# Allegro board bf.brd
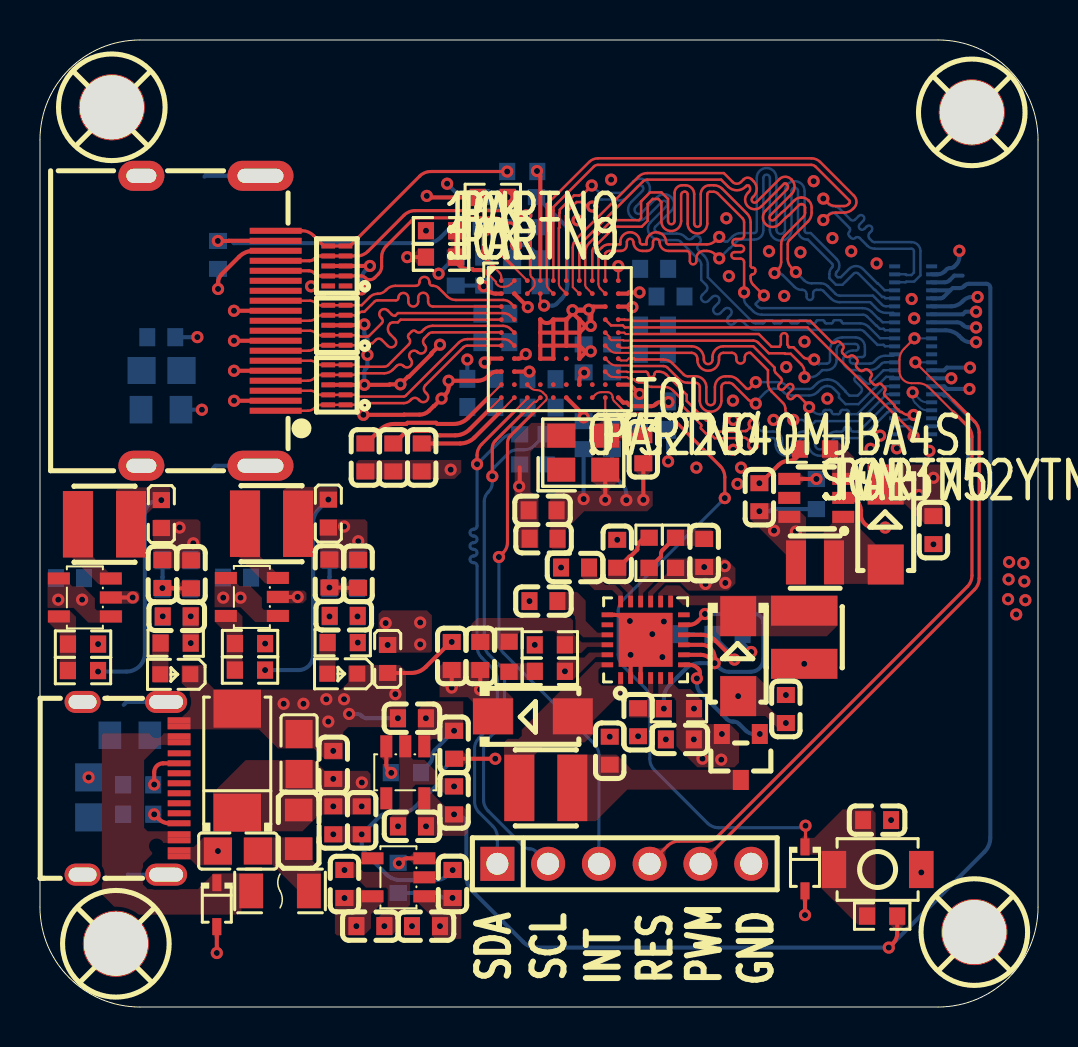
[diagram p0: board, top side]
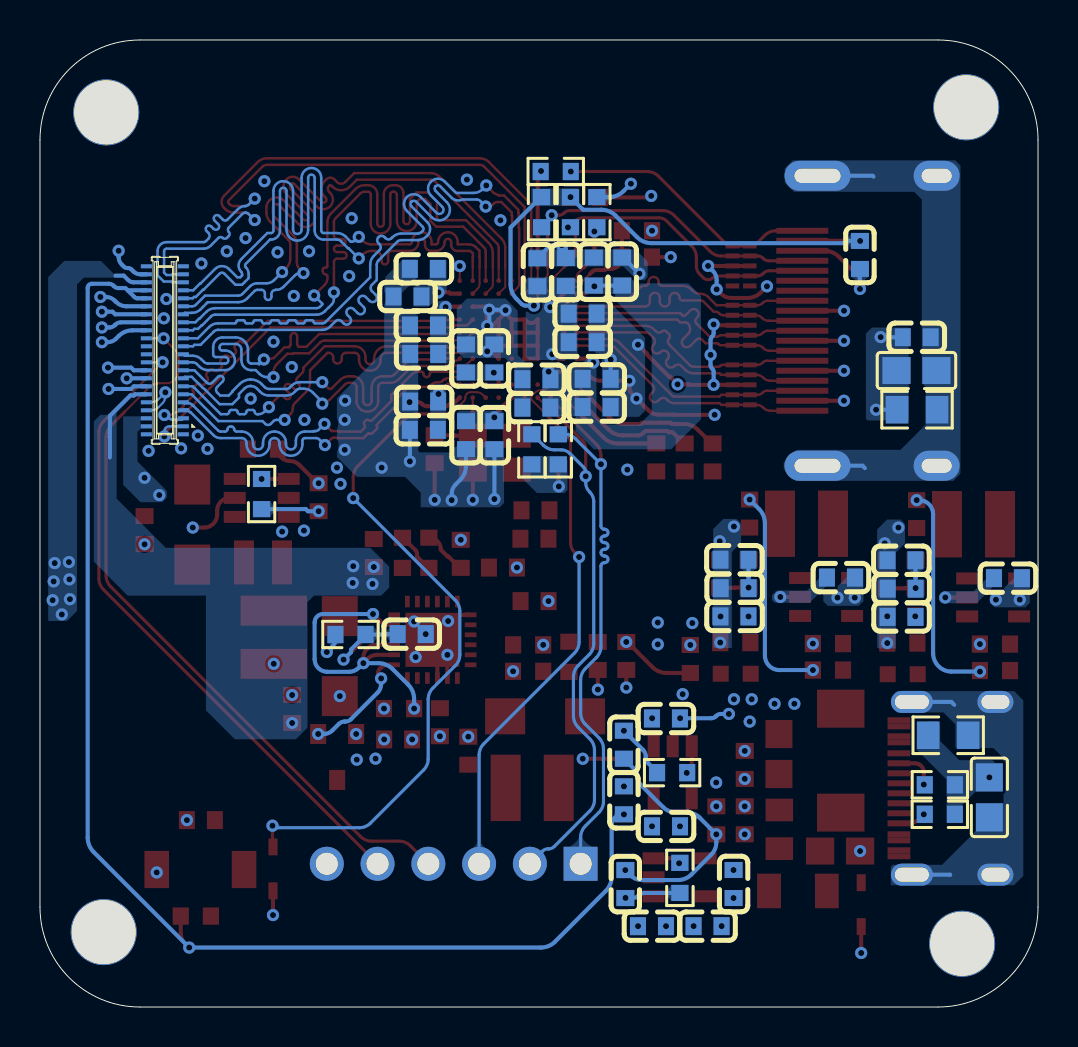
[diagram p1: board, bottom side, seen from below]

Outline 49.94 x 48.36 mm; copper layers: TOP, GND, PWOER, BOTTOM. Coordinates in mm from the lower left corner of the outline.
Outline path: 0,43.36 arc(1.46,46.9) 5,48.36 44.94,48.36 arc(48.47,46.9) 49.94,43.36 49.94,5 arc(48.47,1.46) 44.94,0 5,0 arc(1.46,1.46) 0,5 0,43.36

## Design rules (mm)
constraint set DEFAULT: min track width 0.203
net group MIPI_DIS1: nets MIPI_DSI1_CLK_N MIPI_DSI1_CLK_P MIPI_DSI1_DATA0_N MIPI_DSI1_DATA0_P MIPI_DSI1_DATA1_N MIPI_DSI1_DATA1_P MIPI_DSI1_DATA2_N MIPI_DSI1_DATA2_P MIPI_DSI1_DATA3_N MIPI_DSI1_DATA3_P
net group MIPI_DSI0: nets MIPI_DSI0_CLK_N MIPI_DSI0_CLK_P MIPI_DSI0_DATA0_N MIPI_DSI0_DATA0_P MIPI_DSI0_DATA1_N MIPI_DSI0_DATA1_P MIPI_DSI0_DATA2_N MIPI_DSI0_DATA2_P MIPI_DSI0_DATA3_N MIPI_DSI0_DATA3_P

## Placement (name value [footprint] x y rotation side)
C1  4u7  [C0805]  9.9 7.8 180 top
C2  47uF  [CASE-C]  9.87 12.32 270 top
C3  4u7  [C0805]  12.96 12.65 90 top
C4  100n  [C0603]  14.68 9.34 270 top
C5  10n  [C0603]  14.67 12.11 90 top
C6  1n  [C0603]  16.1 9.34 270 top
C7  4u7  [C0805]  2.43 10.48 270 bottom
C8  1n  [C0603]  18.61 14.44 180 top
C9  10n  [C0603]  20.72 13.12 270 top
C10  100n  [C0603]  20.72 13.12 270 bottom
C11  4u7  [C0603]  9.86 21.48 0 bottom
C12  10u  [C0603]  18.62 14.43 180 bottom
C13  1n  [C0603]  18.61 9.04 180 top
C14  10n  [C0603]  20.72 10.33 90 top
C15  100n  [C0603]  20.72 10.34 90 bottom
C16  10u  [C0603]  18.61 9.03 180 bottom
C17  1n  [C0603]  14.48 21.68 270 top
C18  10n  [C0603]  15.92 21.66 270 top
C19  100n  [C0603]  15.2 19.56 180 top
C20  10u  [C0603]  15.19 22.37 180 bottom
C21  10u  [C0603]  15.18 20.95 180 bottom
C22  22u  [C0603]  15.19 19.53 180 bottom
C23  10n  [C0603]  19.31 4.04 180 top
C24  100n  [C0603]  19.32 4.04 180 bottom
C25  10u  [C0603]  20.65 6.15 90 bottom
C26  10n  [C0603]  16.53 4.05 0 top
C27  100n  [C0603]  16.54 4.04 0 bottom
C28  10u  [C0603]  15.23 6.15 90 bottom
C29  4u7  [C0603]  1.51 21.45 0 bottom
C30  1n  [C0603]  20.64 6.16 90 top
C31  1n  [C0603]  15.24 6.15 90 top
C32  1n  [C0603]  6.13 21.65 270 top
C33  10n  [C0603]  7.56 21.64 270 top
C34  100n  [C0603]  6.84 19.54 180 top
C35  10u  [C0603]  6.82 20.92 180 bottom
C36  10u  [C0603]  6.84 22.34 180 bottom
C37  22u  [C0603]  6.83 19.51 180 bottom
C38  4u7  [C0603]  28.51 12.82 90 top
C39  22u  [C0603]  20.6 17.56 90 top
C40  18p  [C0603]  22.03 17.56 90 top
C41  220n  [C0603]  28.88 22.66 90 top
C42  18p  [C0603]  33.23 22.7 270 top
C43  4u7  [C0603]  32.02 13.38 180 top
C44  100n  [C0603]  29.93 14.24 270 top
C45  10u  [C0603]  44.7 23.85 270 top
C46  22u  [C0603]  35.99 25.5 90 top
C47  100n  [C0603]  31.34 18.65 180 bottom
C48  10n  [C0603]  25.19 20.3 180 top
C49  4n7  [C0603]  26.77 21.98 180 top
C50  22u  [C0603]  37.32 14.9 90 top
C51  4u7  [C0805]  6.08 31.83 180 bottom
C52  10n  [C0603]  6.07 33.5 180 bottom
C53  100n  [C0603]  8.91 37.61 270 bottom
C54  10u  [C0603]  22.08 30 0 bottom
C55  100n  [C0603]  22.08 31.41 0 bottom
C56  10u  [C0603]  25.1 31.4 180 bottom
C57  100n  [C0603]  25.1 29.98 180 bottom
C58  100n  [C0603]  30.73 34.08 0 bottom
C59  10u  [C0603]  30.71 32.66 0 bottom
C60  10u  [C0603]  22.78 33.25 180 bottom
C61  100n  [C0603]  28.62 28.6 270 bottom
C62  100n  [C0603]  23.63 36.76 90 bottom
C63  10u  [C0603]  25.05 36.74 90 bottom
C64  100n  [C0603]  22.78 34.67 180 bottom
C65  10u  [C0603]  27.2 28.6 270 bottom
C66  18p  [C0603]  30.19 27.89 270 top
C67  100n  [C0603]  16.28 27.48 270 top
C68  100n  [C0603]  17.68 27.48 270 top
C69  100n  [C0603]  19.1 27.48 270 top
C70  10u  [C0603]  22.22 36.78 90 bottom
C71  100n  [C0603]  20.8 36.78 90 bottom
C72  100n  [C0603]  27.2 32.44 90 bottom
C73  10u  [C0603]  28.63 32.44 90 bottom
C74  10u  [C0603]  25.15 24.84 0 top
C75  100n  [C0603]  25.2 23.42 0 top
C76  10u  [C0603]  30.73 28.87 0 bottom
C77  100n  [C0603]  30.72 30.29 0 bottom
C78  100n  [C0603]  30.73 36.91 0 bottom
C79  10u  [C0603]  31.55 35.53 0 bottom
C80  100n  [C0603]  41.88 9.35 180 top
CH1  -  [WP7B-P040VA1-R8000]  43.69 32.84 90 bottom
CH2  A254UP-ZD06P  [HDR-TH-6P]  29.24 7.16 0 top
D1  H5VHD3U  [SOD-323]  8.85 5.12 270 top
D2  1N5819  [DO-214AC]  24.66 14.54 0 top
D3  1N5819  [DO-214AC]  42.32 24.13 270 top
D4  1N5819  [DO-214AC]  34.93 17.55 270 top
D5  H3V3HD3U  [SOD-323]  38.28 6.91 270 top
ESD1  IP4292CZ10-TBR,115  [DFN2510A-10]  14.85 31.11 90 top
ESD2  IP4292CZ10-TBR,115  [DFN2510A-10]  14.85 34.1 90 top
ESD3  IP4292CZ10-TBR,115  [DFN2510A-10]  14.85 37.06 90 top
F1  SMD1206-100-30  [PTC1206]  12.01 5.8 0 top
FB1  220R@100MHz  [FB0805]  12.94 8.89 90 top
FB2  600R@100MHz  [FB0603]  17.4 17.41 90 top
FB3  600R@100MHz  [FB0603]  14.43 24.68 270 top
FB4  600R@100MHz  [FB0603]  6.07 24.65 270 top
HDMI1  -  [HDMI-001S]  8.43 34.32 270 top
L1  SWPA3015S2R2NT  [SMD3015]  11.58 24.17 180 top
L2  SWPA3015S2R2NT  [SMD3015]  3.23 24.14 180 top
L3  4.7uH  [SMD3015]  25.31 10.96 0 top
L4  10uH  [SMD252012]  38.78 22.24 0 top
L5  4.7uH  [SMD3015]  38.24 18.49 270 top
LED1  Red  [LED0603]  15.13 16.67 180 top
LED2  Red  [LED0603]  6.77 16.64 180 top
M1  -  [M3]  46.69 44.68 0 top
M2  -  [M3]  3.86 3.1 0 top
M3  -  [M3]  46.81 3.68 0 top
M4  -  [M3]  3.66 44.93 0 top
Q1  AO3401A  [SOT-23]  35.07 12.5 90 top
R1  1M  [R0805]  4.5 13.59 180 bottom
R2  5K11  [R0603]  4.91 11.11 180 bottom
R3  5K11  [R0603]  4.91 9.64 180 bottom
R4  10K  [R0603]  18.31 11.72 180 bottom
R5  41K2  [R0603]  10.51 16.85 180 top
R6  1K  [R0603]  15.15 18.23 180 top
R7  9K09  [R0603]  10.51 18.17 180 top
R8  10K  [R0603]  17.92 6.46 90 bottom
R9  7K68  [R0603]  2.15 16.83 180 top
R10  1K  [R0603]  6.79 18.2 180 top
R11  9K09  [R0603]  2.15 18.15 180 top
R12  43K2  [R0603]  25.51 16.79 180 top
R13  909K  [R0603]  23.47 17.51 90 top
R14  274K  [R0603]  30.48 22.71 270 top
R15  274K  [R0603]  25.51 18.11 180 top
R16  100R  [R0603]  31.97 14.92 180 top
R17  1M2  [R0603]  31.8 22.71 270 top
R18  100K  [R0603]  34.4 18.63 180 bottom
R19  10K  [R0603]  38.85 25.65 90 bottom
R20  9R09  [R0603]  38.78 27.9 180 top
R21  1M  [R0805]  6.05 29.87 180 bottom
R22  46K4  [R0603]  25.32 27.89 90 bottom
R23  46K4  [R0603]  24 27.89 90 bottom
R24  10K  [R0603]  42.14 4.55 180 top
R25  1K  [R0603]  24.13 41.78 180 bottom
R26  46K4  [R0603]  24.84 39.75 90 bottom
R27  46K4  [R0603]  23.39 39.75 90 bottom
R28  10K  [R0603]  20.07 37.5 0 top
R29  100K  [R0603]  22.66 40.49 180 top
R30  2K  [R0603]  22.07 39.75 90 bottom
R31  10K  [R0603]  20.07 38.82 0 top
SW1  1.6N  [SMD4030]  41.91 6.88 180 top
U1  TYPE-C_16PIN  [TYPEC_16PIN]  4.55 10.94 270 top
U2  LP5907MFX-1.8/NOPB  [SOT-23-5]  18.28 11.74 90 top
U3  TLV62569DBV  [SOT-23-5]  10.6 20.51 0 top
U4  TLV62569DBV  [SOT-23-5]  2.25 20.48 0 top
U5  LP5907MFX-1.2/NOPB  [SOT-23-5]  17.93 6.49 0 top
U6  TPS65131RGER  [VQFN-24]  30.3 18.36 90 top
U7  SGM3752YTN6G  [SOT23-6]  38.84 25.46 0 top
U8  TC358870XBG(NOK)  [VFBGA80]  26.01 33.4 0 top
U9  OT322540MJBA4SL  [SMD3225-4P]  27.18 27.72 0 top

## Library data of the parts
C1 C3-C80 = CAP_NP: Tolerance: .TOL; User Part Number: .PARTNO
C2 = CAP_TANTALUM: Tolerance: .TOL; User Part Number: .PARTNO
CH1 = WP7B-P040VA1-R8000: Tolerance: .TOL; User Part Number: .PARTNO
CH2 = TH-6P: Tolerance: .TOL; User Part Number: .PARTNO
D1-D5 = TVS/ESD: Tolerance: .TOL; User Part Number: .PARTNO
ESD1-ESD3 = IP4292CZ10: Tolerance: .TOL; User Part Number: .PARTNO
F1 = Fuse: Tolerance: .TOL; User Part Number: .PARTNO
FB1-FB4 = FerriteBead: Tolerance: .TOL; User Part Number: .PARTNO
HDMI1 = HDMI-A: Tolerance: .TOL; User Part Number: .PARTNO
L1-L5 = Inductor: Tolerance: .TOL; User Part Number: .PARTNO
LED1 LED2 = LED: Tolerance: .TOL; User Part Number: .PARTNO
M1-M4 = M: Tolerance: .TOL; User Part Number: .PARTNO
Q1 = PMOS: Tolerance: .TOL; User Part Number: .PARTNO
R1-R31 = Res: Tolerance: .TOL; User Part Number: .PARTNO
SW1 = Switch-2P: Tolerance: .TOL; User Part Number: .PARTNO
U1 = TYPEC_16PIN: Tolerance: .TOL; User Part Number: .PARTNO
U2 U5 = LP5907MFX: Tolerance: .TOL; User Part Number: .PARTNO
U3 U4 = TLV62569DBV: Tolerance: .TOL; User Part Number: .PARTNO
U6 = TPS65131RGER: Tolerance: .TOL; User Part Number: .PARTNO
U7 = SGM3752YTN6G: Tolerance: .TOL; User Part Number: .PARTNO
U8 = TC358870XBG_1: Tolerance: .TOL; User Part Number: .PARTNO
U9 = XTAL-4P-Oscillator: Tolerance: .TOL; User Part Number: .PARTNO

## Footprints (pads in the part's own frame, mm; a bottom-side part is the same pattern mirrored in y, then rotated)
C0603
  rect 0.8x0.9 smd: 1(-0.7,0) 2(0.7,0)
C0805
  rect 1.41x1.35 smd: 1(-1,0) 2(1,0)
CASE-C
  rect 1.9x2.376 smd: 1(2.6,0) 2(-2.6,0)
DFN2510A-10
  rect 0.25x0.68 smd: 1(-1,-0.435) 2(-0.5,-0.435) 3(0,-0.435) 4(0.5,-0.435) 5(1,-0.435) 6(1,0.435) 7(0.5,0.435) 8(0,0.435) 9(-0.5,0.435) 10(-1,0.435)
DO-214AC
  rect 2x1.8 smd: 1(-2,0) 2(2,0)
FB0603
  rect 0.8x0.864 smd: 1(-0.7,0) 2(0.7,0)
FB0805
  rect 1.133x1.377 smd: 1(-0.966,0) 2(0.966,0)
HDMI-001S
  rect 0.3x2.6 smd: 1(4.5,3.36) 2(4,3.36) 3(3.5,3.36) 4(3,3.36) 5(2.5,3.36) 6(2,3.36) 7(1.5,3.36) 8(1,3.36) 9(0.5,3.36) 10(0,3.36) 11(-0.5,3.36) 12(-1,3.36) 13(-1.5,3.36) 14(-2,3.36) 15(-2.5,3.36) 16(-3,3.36) 17(-3.5,3.36) 18(-4,3.36) 19(-4.5,3.36)
  oval 1.5x3.3 hole 0.7x2.3: 20(-7.25,2.6) 21(7.25,2.6)
  oval 1.5x2.3 hole 0.7x1.5: 22(-7.25,-3.36) 23(7.25,-3.36)
HDR-TH-6P
  rect 1.7x1.7 hole 1.1: 1(-6.35,0)
  round 1.7 hole 1.1: 2(-3.81,0) 3(-1.27,0) 4(1.27,0) 5(3.81,0) 6(6.35,0)
LED0603
  rect 0.8x0.8 smd: 1(-0.749,0) 2(0.749,0)
M3
  round 3.302 hole 3.2: 1(-0.064,0.064)
PTC1206
  rect 1.19x1.728 smd: 1(-1.445,0) 2(1.445,0)
R0603
  rect 0.806x0.864 smd: 1(-0.753,0) 2(0.753,0)
R0805
  rect 1.133x1.377 smd: 1(-1,0) 2(1,0)
SMD3015
  rect 1.5x3.32 smd: 1(1.328,0) 2(-1.328,0)
SMD3225-4P
  rect 1.4x1.2 smd: 1(-1.1,-0.85) 2(1.1,-0.85) 3(1.1,0.85) 4(-1.1,0.85)
SMD4030
  rect 1.23x1.86 smd: 1(-2.185,0) 2(2.185,0)
SMD252012
  rect 1x2.2 smd: 1(-0.95,0) 2(0.95,0)
SOD-323
  rect 0.845x0.455 smd: 1(-1.098,0) 2(1.098,0)
SOT23-6
  rect 1.1x0.6 smd: 1(1.35,-0.95) 2(1.35,0) 3(1.35,0.95) 4(-1.35,0.95) 5(-1.35,0) 6(-1.35,-0.95)
SOT-23
  rect 1x0.8 smd: 1(1.15,-0.95) 2(1.15,0.95) 3(-1.15,0)
SOT-23-5
  rect 1.1x0.6 smd: 1(1.3,-0.95) 2(1.3,0) 3(1.3,0.95) 4(-1.3,0.95) 5(-1.3,-0.95)
TYPEC_16PIN
  oval 1.1x1.8 hole 0.7x1.4: 1(-4.32,-2.415) 3(4.32,-2.415)
  oval 1.1x2.1 hole 0.7x1.7: 2(-4.32,1.764) 4(4.32,1.764)
  rect 0.3x1.14 smd: A1(-3.4,2.414) A4(-2.6,2.414) A5(-1.25,2.414) A6(-0.25,2.414) A7(0.25,2.414) A8(1.25,2.415) A9(2.6,2.415) A12(3.4,2.414) B1(3.1,2.414) B4(2.3,2.415) B5(1.75,2.414) B6(0.75,2.414) B7(-0.75,2.414) B8(-1.75,2.415) B9(-2.3,2.414) B12(-3.1,2.414)
VFBGA80
  round 0.24 smd: A1(-2.925,2.925) A2(-2.275,2.925) A3(-1.625,2.925) A4(-0.975,2.925) A5(-0.325,2.925) A6(0.325,2.925) A7(0.975,2.925) A8(1.625,2.925) A9(2.275,2.925) A10(2.925,2.925) B1(-2.925,2.275) B2(-2.275,2.275) B3(-1.625,2.275) B4(-0.975,2.275) B5(-0.325,2.275) B6(0.325,2.275) B7(0.975,2.275) B8(1.625,2.275) B9(2.275,2.275) B10(2.925,2.275) C1(-2.925,1.625) C2(-2.275,1.625) C9(2.275,1.625) C10(2.925,1.625) D1(-2.925,0.975) D2(-2.275,0.975) D4(-0.975,0.975) D5(-0.325,0.975) D6(0.325,0.975) D7(0.975,0.975) D9(2.275,0.975) D10(2.925,0.975) E1(-2.925,0.325) E2(-2.275,0.325) E4(-0.975,0.325) E5(-0.325,0.325) E6(0.325,0.325) E7(0.975,0.325) E9(2.275,0.325) E10(2.925,0.325) F1(-2.925,-0.325) F2(-2.275,-0.325) F4(-0.975,-0.325) F5(-0.325,-0.325) F6(0.325,-0.325) F7(0.975,-0.325) F9(2.275,-0.325) F10(2.925,-0.325) G1(-2.925,-0.975) G2(-2.275,-0.975) G4(-0.975,-0.975) G5(-0.325,-0.975) G6(0.325,-0.975) G7(0.975,-0.975) G9(2.275,-0.975) G10(2.925,-0.975) H1(-2.925,-1.625) H2(-2.275,-1.625) H9(2.275,-1.625) H10(2.925,-1.625) J1(-2.925,-2.275) J2(-2.275,-2.275) J3(-1.625,-2.275) J4(-0.975,-2.275) J5(-0.325,-2.275) J6(0.325,-2.275) J7(0.975,-2.275) J8(1.625,-2.275) J9(2.275,-2.275) J10(2.925,-2.275) K1(-2.925,-2.925) K2(-2.275,-2.925) K3(-1.625,-2.925) K4(-0.975,-2.925) K5(-0.325,-2.925) K6(0.325,-2.925) K7(0.975,-2.925) K8(1.625,-2.925) K9(2.275,-2.925) K10(2.925,-2.925)
VQFN-24
  rect 0.584x0.24 smd: 1(-1.913,1.25) 2(-1.913,0.75) 3(-1.913,0.25) 4(-1.913,-0.25) 5(-1.913,-0.75) 6(-1.913,-1.25)
  rect 0.24x0.58 smd: 7(-1.25,-1.913) 8(-0.75,-1.913) 9(-0.25,-1.913) 10(0.25,-1.913) 11(0.75,-1.913) 12(1.25,-1.913) 19(1.25,1.913) 20(0.75,1.913) 21(0.25,1.913) 22(-0.25,1.913) 23(-0.75,1.913) 24(-1.25,1.913)
  rect 0.58x0.24 smd: 13(1.913,-1.25) 14(1.913,-0.75) 15(1.913,-0.25) 16(1.913,0.25) 17(1.913,0.75) 18(1.913,1.25)
  rect 2.7x2.7 smd: 25(-0.001,-0.001)
WP7B-P040VA1-R8000
  rect 0.2x0.55 smd: 1(-3.8,-0.925) 2(-3.4,-0.925) 3(-3,-0.925) 4(-2.6,-0.925) 5(-2.2,-0.925) 6(-1.8,-0.925) 7(-1.4,-0.925) 8(-1,-0.925) 9(-0.6,-0.925) 10(-0.2,-0.925) 11(0.2,-0.925) 12(0.6,-0.925) 13(1,-0.925) 14(1.4,-0.925) 15(1.8,-0.925) 16(2.2,-0.925) 17(2.6,-0.925) 18(3,-0.925) 19(3.4,-0.925) 20(3.8,-0.925) 21(3.8,0.925) 22(3.4,0.925) 23(3,0.925) 24(2.6,0.925) 25(2.2,0.925) 26(1.8,0.925) 27(1.4,0.925) 28(1,0.925) 29(0.6,0.925) 30(0.2,0.925) 31(-0.2,0.925) 32(-0.6,0.925) 33(-1,0.925) 34(-1.4,0.925) 35(-1.8,0.925) 36(-2.2,0.925) 37(-2.6,0.925) 38(-3,0.925) 39(-3.4,0.925) 40(-3.8,0.925) P1(-4.2,-0.925) P2(4.2,-0.925) P3(4.2,0.925) P4(-4.2,0.925)

## Nets
GND: C13.2 C14.2 C15.2 C16.2 C26.2 C27.2 C28.2 C31.2 C51.1 C52.1 C53.2 C54.1 C55.1 C56.1 C57.1 C58.2 C59.2 C60.2 C61.2 C62.2 C63.2 C64.2 C65.2 C66.2 C67.2 C68.2 C69.2 C70.2 C71.2 C72.2 C73.2 C74.2 C75.2 C76.2 C77.2 C78.2 C79.2 C80.1 CH1.21 CH1.25 CH1.26 CH1.27 CH1.28 CH1.33 CH1.34 CH1.35 CH1.37 CH1.38 CH2.6 D5.2 ESD1.3 ESD1.8 ESD2.3 ESD2.8 ESD3.3 ESD3.8 FB2.2 HDMI1.2 HDMI1.5 HDMI1.8 HDMI1.11 HDMI1.17 R21.1 R29.2 R31.1 SW1.1 U2.2 U5.2 U8.A10 U8.C9 U8.D4 U8.D5 U8.D6 U8.D7 U8.E4 U8.E5 U8.E6 U8.E7 U8.F4 U8.F5 U8.F6 U8.F7 U8.G4 U8.G5(TEST) U8.G7 U8.H1 U8.K10 U9.2
PGND: C1.2 C2.2 C3.2 C4.2 C5.2 C6.2 C7.1 C8.2 C9.2 C10.2 C11.2 C12.2 C17.2 C18.2 C19.2 C20.2 C21.2 C22.2 C23.2 C24.2 C25.2 C29.2 C30.2 C32.2 C33.2 C34.2 C35.2 C36.2 C37.2 C38.2 C39.2 C41.2 C43.2 C44.2 C45.2 C46.2 C47.2 C48.2 C49.2 C50.2 D1.2 FB2.1 L5.1 LED1.1(CATHODE) LED2.1(CATHODE) R1.1 R2.2 R3.2 R7.1 R11.1 R15.2 R20.2 U1.A1 U1.A12 U1.B1 U1.B12 U3.2 U4.2 U6.2 U6.3 U6.19 U6.25 U7.2
VCC_1V1: C32.1 C33.1 C34.1 C35.1 C36.1 C37.1 C58.1 C59.1 C60.1 C61.1 C62.1 C63.1 C64.1 C65.1 FB4.2 R10.1 U8.B2 U8.C10 U8.G2 U8.K6
VCC_1V2: C26.1 C27.1 C28.1 C31.1 C76.1 C77.1 C78.1 C79.1 U5.5(OUT) U8.B10 U8.J10
VCC_1V8: C13.1 C14.1 C15.1 C16.1 C72.1 C73.1 C74.1 C75.1 CH1.23 CH1.24 R22.1 R23.1 R24.1 U2.5(OUT) U8.J7 U9.4(VDD)
VCC_3V3: C8.1 C9.1 C10.1 C12.1 C17.1 C18.1 C19.1 C20.1 C21.1 C22.1 C23.1 C24.1 C25.1 C30.1 C46.1 C54.2 C55.2 C56.2 C57.2 C70.1 C71.1 FB3.2 L4.1 R4.1 R6.1 R8.1 R19.1 R28.1 R30.2 U2.1 U5.1 U7.6(VIN) U8.B1 U8.G1 U8.H2
VCC_5V: C2.1 C3.1 C4.1 C5.1 C6.1 C11.1 C29.1 C43.1 FB1.2 Q1.2 R16.1 R18.1 U3.1 U3.4(VIN) U4.1 U4.4(VIN) U6.5 U6.6
VCC_5V5: C39.1 C40.1 CH1.22 D2.1(CATHODE) R12.1 U6.23
VCC_HDMIRX_IN: C53.1 HDMI1.18 R26.2 R27.2 R29.1 U8.B4
VCC_LED_AB: C45.1 CH1.39 CH1.40 D3.1(CATHODE)
VEE_5V5: C42.2 C50.1 CH1.36 D4.2 R17.2 U6.15
HDMI_CLK_N: ESD2.5 ESD2.6 HDMI1.12 U8.C2
HDMI_CLK_P: ESD2.4 ESD2.7 HDMI1.10 U8.C1
HDMI_DATA0_N: ESD2.2 ESD2.9(N.C./4) HDMI1.9 U8.D2
HDMI_DATA0_P: ESD2.1 ESD2.10 HDMI1.7 U8.D1
HDMI_DATA1_N: ESD1.5 ESD1.6 HDMI1.6 U8.E2
HDMI_DATA1_P: ESD1.4 ESD1.7 HDMI1.4 U8.E1
HDMI_DATA2_N: ESD1.2 ESD1.9(N.C./4) HDMI1.3 U8.F2
HDMI_DATA2_P: ESD1.1 ESD1.10 HDMI1.1 U8.F1
HDP: ESD3.5 ESD3.6 HDMI1.19 R25.2
I2C_SCL: CH2.2 R22.2 U8.K4
I2C_SDA: CH2.1 R23.2 U8.K3
INT: CH2.3 U8.J3
LED_FB: R20.1 U7.3
MIPI_DSI0_CLK_N: CH1.5 U8.F9
MIPI_DSI0_CLK_P: CH1.6 U8.F10
MIPI_DSI0_DATA0_N: CH1.3 U8.H9
MIPI_DSI0_DATA0_P: CH1.4 U8.H10
MIPI_DSI0_DATA1_N: CH1.7 U8.G9
MIPI_DSI0_DATA1_P: CH1.8 U8.G10
MIPI_DSI0_DATA2_N: CH1.9 U8.E9
MIPI_DSI0_DATA2_P: CH1.10 U8.E10
MIPI_DSI0_DATA3_N: CH1.1 U8.D9
MIPI_DSI0_DATA3_P: CH1.2 U8.D10
MIPI_DSI1_CLK_N: CH1.16 U8.B7
MIPI_DSI1_CLK_P: CH1.15 U8.A7
MIPI_DSI1_DATA0_N: CH1.18 U8.B9
MIPI_DSI1_DATA0_P: CH1.17 U8.A9
MIPI_DSI1_DATA1_N: CH1.14 U8.B8
MIPI_DSI1_DATA1_P: CH1.13 U8.A8
MIPI_DSI1_DATA2_N: CH1.12 U8.B6
MIPI_DSI1_DATA2_P: CH1.11 U8.A6
MIPI_DSI1_DATA3_N: CH1.20 U8.B5
MIPI_DSI1_DATA3_P: CH1.19 U8.A5
PWM: CH1.32 CH2.5
RESETN: C80.2 D5.1(CATHODE) R24.2 SW1.2 U8.K8
RESX: CH1.29 CH2.4
SCL: ESD3.2 ESD3.9(N.C./4) HDMI1.15 R27.1 U8.A3
SDA: ESD3.4 ESD3.7 HDMI1.16(SDA) R26.1 U8.B3
N236681: D1.1(CATHODE) F1.1 U1.A4 U1.A9 U1.B4(VBUS_3) U1.B9
N236693: C1.1 F1.2 FB1.1
N236737: C7.2 R1.2 U1.1 U1.2 U1.3 U1.4
N236965: R2.1 U1.A5
N237015: R3.1 U1.B5
N238261: L1.1 U3.3
N238489: R5.2 R7.2 U3.5
N242953: L2.1 U4.3
N243181: R9.2 R11.2 U4.5
N255792: D3.2 L4.2 U7.1
N259894: D2.2 L3.2 U6.1 U6.24
N259982: Q1.1 U6.7
N260038: C38.1 L3.1 Q1.3(SOURCE)
N260195: C44.1 R16.2 U6.4 U6.8 U6.9 U6.11
N260318: C47.1 R18.2 U6.10
N262227: R12.2 R13.1
N262241: C40.2 R13.2 R15.1 U6.22
N262519: C41.1 R14.1 U6.17(VREF)
N262525: C42.1 R14.2 R17.1 U6.16
N262973: D4.1(CATHODE) L5.2 U6.13 U6.14
N263055: C48.1 U6.21
N263067: C49.1 U6.18
N271809: C51.2 C52.2 HDMI1.20 HDMI1.21 HDMI1.22 HDMI1.23 R21.2
N279408: R28.2 R31.2 U8.A2
N284077: C67.1 U8.J1
N284159: C68.1 U8.K1
N284174: C69.1 U8.K2
N284871: C66.1 U8.K9 U9.3
N2381410: FB3.1 L1.2 R5.1
N2382151: LED1.2 R6.2
N2390621: R4.2 U2.3
N2428410: FB4.1 L2.2 R9.1
N2429111: LED2.2 R10.2
N2437651: R8.2 U5.3
N2531863: R19.2 U7.4
N2739972: R25.1 U8.A4
N27399713: R30.1 U8.A1

Pads without a net: CH1 30 31 P1 P2 P3 P4; ESD3 1 10; HDMI1 13 14; M1 1; M2 1; M3 1; M4 1; U1 A6 A7 A8 B6 B7 B8; U2 4; U5 4; U6 12 20; U7 5; U8 G6 J2 J4 J5 J6 J8 J9 K5 K7; U9 1

## Via types
v1: diameter 0.61, hole 0.305, TOP to BOTTOM, 240 vias

## Routing (per net, layer and track width the routed paths; a pad name or vN(x,y) marks a point on that pad's centre or on a via; arc(x,y) is an arc through that point)
GND: length 103
  TOP w0.102: U8.A10 28.93,36.98
  TOP w0.203: U8.F5 U8.F6 ; U8.F5 U8.E5 ; U8.F5 U8.G5 U8.G4 U8.F4 ; U8.F5 U8.F4 ; U8.F6 U8.F7 ; U8.F6 U8.E6 ; 26.62,34.74 26.62,34.82 v1(26.64,34.85) ; 26.62,34.74 U8.D7 ; 26.62,34.74 26.62,34.66 U8.D6 ; HDMI1.5 v1(9.71,31.82) ; D5.2 v1(38.28,4.6) ; U8.D7 27.3,34.06 27.32,34.06 ; U8.D7 U8.E7 ; U8.E4 U8.E5 ; U8.E4 U8.F4 ; U8.E4 U8.D4 25.1,34.32 arc(25.36,34.21) 25.62,34.32 U8.D5 ; U8.E5 U8.E6 ; U8.E5 U8.D5 ; U8.F7 U8.G7 27.35,32.79 ; U8.F7 U8.E7 ; U8.F7 27.27,32.79 27.35,32.79 ; v1(8.91,35.91) 8.91,36.21 arc(8.96,36.45) 9.09,36.65 9.97,37.52 arc(10.3,37.74) 10.69,37.82 HDMI1.17 ; U8.E7 27.32,34.06 ; U8.E7 U8.E6 ; v1(16.51,37.06) ESD3.3 ESD3.8 ; v1(16.18,29.62) 18.21,29.62 18.22,29.62 18.99,29.62 arc(19.25,29.68) 19.47,29.82 19.7,30.05 19.71,30.05 v1(20.09,30.43) 20.28,30.62 arc(20.4,30.8) 20.45,31.02 v1(20.45,31.32) 21.89,31.32 arc(22.18,31.37) 22.41,31.53 22.52,31.64 arc(22.67,31.74) 22.85,31.78 U8.H1 ; U8.D5 U8.D6 ; U8.D6 U8.E6 ; ESD1.8 ESD1.3 16.23,31.11 v1(16.23,31.12) 17.48,31.12 17.5,31.14 v1(18.03,31.14) 18.41,31.52 18.45,31.52 19.58,32.65 19.58,32.69 v1(20.02,33.12) ; 27.35,32.79 v1(27.56,32.79) ; v1(13.56,36.04) 13.87,35.74 arc(14.18,35.53) 14.54,35.46 15.36,35.46 arc(15.63,35.51) 15.85,35.66 v1(16.08,35.89) ; HDMI1.2 v1(9.71,30.32) ; v1(19.35,40.56) 19.43,40.49 R29.2 ; v1(27.46,34.87) 27.55,34.96 arc(27.62,35.01) 27.7,35.03 U8.C9 ; v1(31.45,30.25) 31.04,30.25 arc(30.92,30.23) 30.82,30.16 30.8,30.14 arc(30.7,30.07) 30.59,30.05 29.65,30.05 arc(29.55,30.07) 29.47,30.12 29.36,30.23 29.18,30.23 U8.K10 ; v1(27.56,34.06) 27.32,34.06 ; HDMI1.11 v1(9.71,34.82) ; 28.93,36.98 v1(28.93,37.05) ; U9.2 v1(28.28,25.36) ; C66.2 v1(30.19,25.36) ; v1(16.23,34.14) 16.19,34.1 ESD2.3 ESD2.8 ; HDMI1.8 v1(9.71,33.32) ; SW1.1 v1(44.1,6.73)
  TOP w0.254: v1(27.56,34.06) 27.56,34.77 v1(27.46,34.87) 27.43,34.85 v1(26.64,34.85)
  BOTTOM w0.102: CH1.37 44.37,30.24 arc(44.18,30.28) 44.01,30.39 v1(43.66,30.74) 43.66,30.53 arc(43.7,30.35) 43.8,30.21 44.01,29.99 arc(44.18,29.88) 44.37,29.84 CH1.38
  BOTTOM w0.203: v1(29.34,25.35) 29.34,25.66 arc(29.29,25.91) 29.14,26.13 28.92,26.35 arc(28.7,26.68) 28.62,27.07 C61.2 ; v1(46.84,34.77) 46.3,34.77 46.17,34.64 CH1.26 ; C65.2 v1(27.2,25.4) ; v1(7.87,33.5) 7.87,33.5 C52.1 ; CH1.27 45.89,34.24 arc(46.03,34.21) 46.16,34.13 46.19,34.1 arc(46.32,34.01) 46.47,33.99 v1(46.84,33.99) ; v1(26.64,34.85) 26.67,34.87 v1(27.46,34.87) 27.46,34.16 v1(27.56,34.06) ; C71.2 20.75,37.48 v1(19.95,36.67) ; v1(8.1,29.87) 8.1,29.87 R21.1 ; CH1.33 45.24,31.84 45.38,31.98 v1(46.53,31.98) ; v1(46.91,35.51) 46.63,35.51 arc(46.4,35.46) 46.21,35.33 46.13,35.26 arc(45.89,35.1) 45.6,35.04 CH1.25 ; C55.1 v1(21.38,32.38) ; v1(16.51,37.06) 16.28,36.83 arc(16.13,36.61) 16.08,36.35 v1(16.08,35.89) ; CH1.34 v1(45.6,31.44) ; CH1.35 45.24,31.04 45.38,30.91 v1(46.5,30.91) ; CH1.28 45.31,33.84 arc(45.68,33.77) 45.99,33.56 46.13,33.42 arc(46.32,33.29) 46.55,33.25 v1(46.84,33.25) ; C53.2 v1(8.91,35.91) ; C63.2 24.39,38.1 v1(23.83,38.1) 23.63,37.9 C62.2 ; CH1.21 44.91,36.64 arc(45.1,36.68) 45.26,36.79 45.36,36.89 arc(45.44,36.94) 45.53,36.96 45.57,36.96 arc(45.66,36.98) 45.74,37.03 45.85,37.14 arc(45.96,37.3) 46,37.5 v1(46,37.82) ; v1(16.23,34.14) 16.23,33.69 arc(16.25,33.61) 16.29,33.54 16.32,33.51 arc(16.37,33.45) 16.38,33.36 v1(16.38,32.61) 16.38,32.09 arc(16.37,32.01) 16.32,31.94 16.29,31.91 arc(16.25,31.84) 16.23,31.76 v1(16.23,31.12) ; C76.2 v1(31.43,27.29)
  vias: v1(15.24,6.85) v1(17.3,19.2) v1(17.23,4.05) v1(17.4,18.11) v1(17.91,9.04) v1(19.02,19.23) v1(19.02,18.14) v1(19.31,38.82) v1(20.55,26.87) v1(20.72,11.03) v1(26.9,39.34) v1(28.57,41.38) v1(32.84,26.97) v1(34.34,39.45) v1(34.47,36.55) v1(34.67,30.33) v1(34.69,29.37) v1(34.69,27.87) v1(34.9,26.16) v1(35.08,26.97) v1(36.47,37.8) v1(36.7,29.36) v1(37.24,35.56) v1(37.34,32) v1(38.05,37.74) v1(38.25,33.27) v1(38.71,41.3) v1(39.4,30.43) v1(39.65,38.46) v1(40.59,37.8) v1(41.55,27.91) v1(41.86,37.19) v1(42.04,28.58) v1(42.58,9.35) v1(42.88,27.94) v1(43.61,35.41) v1(43.74,34.44) v1(44.5,27.81)
PGND: length 43.8
  TOP w0.203: U6.2 v1(29.55,17.61) 30.05,18.11 ; v1(14.48,20.98) 15.16,20.98 15.17,20.96 C18.2 ; FB2.1 18.58,16.71 arc(18.97,16.78) 19.3,17 20.55,18.26 v1(20.6,18.26) ; D1.2 v1(8.85,2.7) ; U7.2 40.44,25.46 arc(40.89,25.28) 41.07,24.83 41.07,24.63 arc(41.26,24.17) 41.72,23.98 v1(42.29,23.98) ; 30.05,18.11 U6.25 29.27,19.39 arc(29.03,19.56) 28.74,19.61 U6.19 ; 30.05,18.11 U6.3 ; v1(6.13,20.95) 6.66,20.95 6.67,20.94 C33.2 ; R20.2 38.03,27.87 arc(37.86,27.47) 37.46,27.31 37.44,27.31 arc(37.18,27.26) 36.96,27.11 36.04,26.2 v1(35.99,26.2) ; C45.2 v1(44.7,23.14) ; C9.2 v1(22.78,12.42) ; U4.2 v1(4.64,20.48) ; U3.2 v1(12.89,20.51)
  GND w0.203: 37.34,25.1 37.09,25.1 v1(35.99,26.2)
  BOTTOM w0.203: v1(17.91,14.44) 16.35,14.44 arc(16.23,14.47) 16.12,14.53 16.09,14.56 arc(15.99,14.63) 15.87,14.66 v1(15.47,14.66) ; C36.2 6.14,21.49 6.13,21.48 v1(6.13,20.95) ; v1(14.48,20.98) 14.48,21.51 14.49,21.52 C20.2 ; v1(20.65,6.85) 20.39,6.58 arc(20.13,6.41) 19.82,6.35 18.01,6.35 arc(17.65,6.42) 17.35,6.62 16.35,7.62 arc(16.16,7.9) 16.1,8.23 v1(16.1,8.64) 16.95,9.49 arc(17.2,9.65) 17.49,9.71 18.05,9.71 arc(18.44,9.79) 18.77,10.01 19.89,11.13 arc(20,11.29) 20.04,11.49 20.04,11.53 arc(20.08,11.72) 20.19,11.89 C10.2
  vias: v1(2.43,11.48) v1(2.91,18.15) v1(6.14,19.54) v1(8.9,7.8) v1(11.26,18.17) v1(12.19,15.16) v1(13.18,15.16) v1(14.33,15.39) v1(14.49,19.53) v1(14.43,14.27) v1(14.67,12.81) v1(14.68,8.64) v1(15.21,15.39) v1(17.78,15.65) v1(18.61,4.04) v1(24.49,20.3) v1(24.76,18.11) v1(26.07,21.98) v1(28.51,13.52) v1(28.88,23.36) v1(29.51,19.3) v1(29.93,13.54) v1(30.64,18.65) v1(31.22,19.28) v1(31.14,17.5) v1(31.32,13.38) v1(37.32,15.6) v1(38.24,17.16)
VCC_1V1: length 3.7
  TOP w0.203: v1(24.31,32.65) 24.18,32.52 arc(24.07,32.45) 23.94,32.43 U8.G2 ; v1(29.64,35) 29.62,35.03 U8.C10 ; U8.K6 27.2,29.61 v1(27.2,29.49) ; U8.B2 v1(24.41,35) ; v1(7.54,18.2) 7.54,18.26
  vias: v1(6.98,23.98) v1(7.54,19.54) v1(7.67,23.19)
VCC_1V2: length 2.7
  TOP w0.203: v1(30,30.66) 29.62,31.03 29.61,31.03 29.52,31.13 U8.J10 ; v1(30,35.74) 29.46,35.74 29.4,35.68 U8.B10
  BOTTOM w0.203: v1(30,30.66) 30.02,30.64 C77.1
  vias: v1(15.24,5.45) v1(15.83,4.05)
VCC_1V8: length 68.9
  TOP w0.203: 24,26.99 24,26.06 v1(23.98,26.04) ; U8.J7 26.98,31.33 arc(27.01,31.47) 27.09,31.59 v1(27.23,31.72) ; R24.1 42.89,3.67 arc(42.84,3.42) 42.69,3.2 v1(42.47,2.97)
  BOTTOM w0.102: 45.66,35.95 45.69,35.95
  BOTTOM w0.203: 45.54,35.84 45.66,35.95 ; 45.54,35.84 CH1.23 ; 45.54,35.84 45.2,35.5 arc(45.14,35.46) 45.06,35.44 CH1.24 ; C15.1 20.77,9.64 arc(21.17,9.47) 21.33,9.08 21.33,6.52 arc(21.41,6.13) 21.63,5.8 24.16,3.27 arc(24.49,3.05) 24.88,2.97 v1(42.47,2.97) 47.25,7.75 arc(47.47,8.08) 47.55,8.47 47.55,35.97 arc(47.49,36.11) 47.35,36.17 46.49,36.17 arc(46.37,36.15) 46.26,36.08 46.23,36.05 arc(46.13,35.98) 46.01,35.95 45.69,35.95
  vias: v1(19.31,9.04) v1(20.72,9.63)
VCC_3V3: length 15.4
  TOP w0.203: R28.1 v1(18.38,37.5) ; U8.H2 v1(24.49,31.78) ; U8.G1 22.56,32.43 arc(22.45,32.4) 22.36,32.34 v1(22.25,32.23) ; U8.B1 22.8,35.68 arc(22.58,35.72) 22.4,35.84 v1(22.2,36.04)
  BOTTOM w0.203: C71.1 C70.1 ; v1(35.99,24.8) 36.53,24.8 36.63,24.9 R19.1 ; v1(20.37,41.17) 20.74,40.8 arc(21.07,40.58) 21.46,40.5 R30.2 ; R4.1 19.06,11.75 19.5,12.19 arc(19.59,12.33) 19.63,12.5 19.63,12.54 arc(19.66,12.71) 19.76,12.85 v1(20.72,13.82) ; R8.1 19.7,5.7 arc(19.85,5.68) 19.97,5.59 20,5.57 arc(20.12,5.48) 20.26,5.46 v1(20.64,5.46)
  vias: v1(15.21,24.03) v1(15.89,19.53) v1(15.9,18.23) v1(15.93,23.29) v1(19.31,14.44) v1(20.01,4.04) v1(36.73,23.83) v1(37.82,23.77)
VCC_5V: length 1
  BOTTOM w0.203: R18.1 35.15,18.39 arc(35.19,18.2) 35.3,18.04 v1(35.59,17.75)
  vias: v1(0.91,20.37) v1(2.11,20.37) v1(9.17,20.47) v1(10.03,20.47) v1(14.67,11.41) v1(14.68,10.04) v1(16.1,11.23) v1(16.1,10.04) v1(32.72,14.92) v1(32.72,13.38) v1(33.15,12.42) v1(34.12,13.65) v1(34.09,12.37)
VCC_5V5: length 5.2
  TOP w0.203: C39.1 20.6,15.98 v1(20.6,15.98) ; C40.1 22.03,15.88 v1(22.02,15.88)
  PWOER w0.203: v1(22.02,15.88) 23.57,15.88 23.67,15.98
  BOTTOM w0.203: CH1.22 45.26,36.24 arc(45.4,36.27) 45.52,36.35 45.74,36.58 46.16,36.58
  vias: v1(26.27,16.79) v1(48.49,22.25) v1(48.46,21.39) v1(48.44,20.4) v1(48.84,19.63) v1(49.2,22.2) v1(49.25,21.29) v1(49.3,20.35)
VCC_HDMIRX_IN: length 25.8
  TOP w0.102: v1(25.22,35.08) 25.12,35.18 arc(25.06,35.27) 25.03,35.39 U8.B4
  TOP w0.203: v1(8.9,38.31) 9.43,38.31 9.44,38.32 HDMI1.18
  BOTTOM w0.203: v1(25.22,35.08) 25.64,35.08 arc(25.75,35.1) 25.84,35.16 26.09,35.41 arc(26.31,35.74) 26.39,36.13 26.39,38.98 24.87,40.5 R26.2 ; v1(23.39,40.5) 22.76,39.87 21.85,39.87 arc(21.46,39.8) 21.13,39.58 20.06,38.5 arc(19.73,38.28) 19.34,38.2 9.7,38.2 9.59,38.31 C53.1 v1(8.9,38.31)
VCC_LED_AB:
  vias: v1(43.97,25.6) v1(44.7,26.47)
VEE_5V5: length 4.5
  TOP w0.203: 34.9,15.47 34.93,15.5 v1(34.93,15.55) 34.9,15.55 34.87,15.57
  BOTTOM w0.203: CH1.36 45.18,30.64 45.24,30.58 45.42,30.58 46.44,29.56 46.44,27.48
  vias: v1(33.23,22) v1(33.3,21.16) v1(34.26,22.05) v1(34.29,21.21) v1(37.32,14.2)
HDMI_CLK_N: length 13.2
  TOP w0.124: HDMI1.12 13.52,35.32 arc(13.66,35.29) 13.77,35.22 13.79,35.2 arc(13.9,35.12) 14.04,35.1 ESD2.6 ESD2.5 16.09,35.1 16.5,35.51 arc(16.68,35.63) 16.89,35.67 16.91,35.67 arc(17.11,35.71) 17.28,35.82 17.34,35.89 arc(17.55,36.02) 17.78,36.07 18.82,36.07 arc(18.94,36.12) 18.98,36.23 18.98,36.27 arc(19.23,36.51) 19.48,36.27 19.48,36.23 arc(19.53,36.12) 19.65,36.07 19.67,36.07 arc(19.83,36.04) 19.96,35.95 20.37,35.54 arc(20.57,35.41) 20.81,35.36 23.18,35.36 arc(23.38,35.32) 23.56,35.2 U8.C2
HDMI_CLK_P: length 13.3
  TOP w0.124: HDMI1.10 13.48,34.32 arc(13.65,34.35) 13.8,34.45 13.81,34.47 arc(13.96,34.56) 14.13,34.6 ESD2.7 ESD2.4 15.75,34.6 arc(15.85,34.62) 15.93,34.67 15.97,34.71 arc(16.04,34.75) 16.12,34.77 16.23,34.77 16.74,35.28 arc(16.81,35.32) 16.89,35.34 17.81,35.34 arc(17.9,35.38) 17.93,35.46 arc(17.96,35.57) 18.02,35.66 arc(18.29,35.69) 18.43,35.46 18.43,35.28 arc(18.68,35.03) 18.92,35.28 18.92,35.47 arc(19.17,35.72) 19.42,35.47 19.42,35.28 arc(19.49,35.11) 19.67,35.03 23.08,35.03 U8.C1
HDMI_DATA0_N: length 13.4
  TOP w0.124: HDMI1.9 13.52,33.82 arc(13.66,33.79) 13.77,33.72 13.79,33.7 arc(13.9,33.62) 14.04,33.6 ESD2.9 ESD2.2 15.85,33.6 arc(15.91,33.59) 15.96,33.57 16.03,33.52 16.38,33.52 16.41,33.55 16.46,33.55 17.11,34.2 arc(17.15,34.31) 17.11,34.43 17.05,34.48 arc(17.05,34.83) 17.4,34.83 17.6,34.63 arc(17.67,34.58) 17.75,34.57 17.77,34.57 17.91,34.7 23.19,34.7 arc(23.39,34.66) 23.56,34.55 U8.D2
HDMI_DATA0_P: length 13.3
  TOP w0.124: U8.D1 18.04,34.38 17.91,34.24 17.65,34.24 arc(17.58,34.23) 17.53,34.19 17.52,34.18 arc(17.41,33.91) 17.52,33.65 17.75,33.42 arc(17.75,33.07) 17.4,33.07 17.1,33.36 arc(16.95,33.43) 16.8,33.36 16.64,33.2 16.09,33.2 arc(16.03,33.19) 15.98,33.16 15.97,33.14 arc(15.92,33.11) 15.86,33.1 ESD2.1 ESD2.10 14.07,33.1 arc(13.9,33.06) 13.76,32.97 13.74,32.95 arc(13.6,32.85) 13.43,32.82 HDMI1.7
HDMI_DATA1_N: length 13.4
  TOP w0.124: HDMI1.6 13.55,32.32 arc(13.68,32.3) 13.78,32.23 13.8,32.21 arc(13.9,32.14) 14.02,32.11 ESD1.6 ESD1.5 15.79,32.11 arc(15.84,32.1) 15.88,32.08 15.9,32.06 arc(15.94,32.03) 15.99,32.02 17.22,32.02 arc(17.33,32.04) 17.42,32.1 18.46,33.14 arc(18.52,33.29) 18.46,33.44 arc(18.41,33.54) 18.46,33.64 18.6,33.79 arc(18.7,33.83) 18.81,33.79 arc(18.96,33.73) 19.11,33.79 19.2,33.89 arc(19.41,34.02) 19.64,34.07 23.16,34.07 arc(23.38,34.03) 23.56,33.91 U8.E2
HDMI_DATA1_P: length 13.4
  TOP w0.124: U8.E1 23.07,33.74 19.64,33.74 arc(19.53,33.72) 19.44,33.65 19.24,33.46 arc(19.17,33.28) 19.24,33.11 19.24,33.11 arc(19.24,32.75) 18.89,32.75 arc(18.54,32.75) 18.54,32.4 arc(18.54,32.05) 18.19,32.05 18.19,32.06 arc(18.01,32.13) 17.84,32.06 17.65,31.87 arc(17.45,31.74) 17.22,31.69 15.93,31.69 15.86,31.61 ESD1.4 ESD1.7 14.09,31.61 arc(13.91,31.58) 13.75,31.48 13.73,31.46 arc(13.58,31.36) 13.4,31.32 HDMI1.4
HDMI_DATA2_N: length 13.3
  TOP w0.124: U8.F2 23.56,33.25 arc(23.39,33.36) 23.19,33.4 21.39,33.4 arc(21.15,33.36) 20.95,33.22 18.29,30.56 arc(18.25,30.54) 18.2,30.53 15.94,30.53 15.86,30.61 ESD1.2 ESD1.9 14.02,30.61 arc(13.9,30.64) 13.8,30.71 13.78,30.73 arc(13.68,30.8) 13.55,30.82 HDMI1.3
HDMI_DATA2_P: length 13.3
  TOP w0.124: HDMI1.1 13.4,29.82 arc(13.58,29.86) 13.73,29.96 13.75,29.98 arc(13.91,30.08) 14.09,30.11 ESD1.10 ESD1.1 15.86,30.11 15.94,30.2 18.2,30.2 arc(18.38,30.24) 18.52,30.33 18.58,30.39 arc(18.76,30.46) 18.93,30.39 19,30.32 arc(19.35,30.32) 19.35,30.67 19.28,30.74 arc(19.21,30.92) 19.28,31.09 21.18,32.99 arc(21.27,33.05) 21.39,33.08 U8.F1
HDP: length 13.4
  TOP w0.156: HDMI1.19 13.12,38.82 arc(13.42,38.76) 13.68,38.59 14.14,38.13 arc(14.21,38.08) 14.3,38.06 ESD3.6 ESD3.5 15.41,38.06 arc(15.5,38.08) 15.57,38.13 19,41.55 arc(19.25,41.72) 19.55,41.78 v1(23.38,41.78)
I2C_SCL: length 30.3
  TOP w0.102: 24.28,29.82 24.73,30.27 24.82,30.27 U8.K4
  TOP w0.156: 24.28,29.82 22.78,28.32 arc(22.67,28.15) 22.63,27.96 v1(22.63,26.54)
  BOTTOM w0.156: R22.2 25.29,28.64 24.75,28.09 arc(24.49,27.92) 24.19,27.86 23.85,27.86 arc(23.62,27.82) 23.43,27.69 22.74,27 arc(22.66,26.88) 22.63,26.73 v1(22.63,26.54) 22.63,26.22 arc(22.58,25.98) 22.44,25.76 22.42,25.74 arc(22.28,25.53) 22.23,25.28 22.23,18.18 arc(22.29,17.88) 22.46,17.62 23.02,17.07 arc(23.19,16.81) 23.25,16.51 23.25,14.55 arc(23.19,14.25) 23.02,14 22.42,13.4 arc(22.25,13.15) 22.19,12.85 22.19,10.36 arc(22.25,10.06) 22.42,9.81 24.21,8.02 arc(24.34,7.94) 24.49,7.91 24.52,7.91 arc(24.67,7.88) 24.79,7.79 CH2.2
I2C_SDA: length 29.5
  TOP w0.102: U8.K3 24.38,30.43 23.77,29.82
  TOP w0.156: 23.77,29.82 22.1,28.14 arc(21.93,27.89) 21.87,27.59 v1(21.87,27.15)
  BOTTOM w0.156: R23.2 23.67,28.64 arc(23.39,28.59) 23.15,28.43 v1(21.87,27.15) 21.87,24.06 arc(21.82,23.94) 21.7,23.89 21.68,23.89 arc(21.51,23.73) 21.68,23.56 21.7,23.56 arc(21.87,23.39) 21.7,23.22 21.68,23.22 arc(21.51,23.06) 21.68,22.89 21.7,22.89 arc(21.87,22.72) 21.7,22.56 21.68,22.56 arc(21.51,22.39) 21.68,22.22 21.7,22.22 arc(21.82,22.17) 21.87,22.05 21.87,18.03 arc(21.93,17.73) 22.1,17.47 22.66,16.92 arc(22.83,16.66) 22.89,16.36 22.89,14.7 arc(22.83,14.4) 22.66,14.15 21.97,13.46 arc(21.8,13.21) 21.74,12.91 21.74,10.28 arc(21.8,9.98) 21.97,9.73 22.66,9.04 arc(22.83,8.79) 22.89,8.49 CH2.1
INT: length 27.5
  TOP w0.102: 24.79,29.82 25.31,30.33 arc(25.36,30.46) 25.31,30.59 25.17,30.72 arc(25.03,30.82) 24.86,30.85 24.84,30.85 arc(24.67,30.89) 24.53,30.98 U8.J3
  TOP w0.156: 24.79,29.82 23.55,28.58 arc(23.43,28.4) 23.39,28.2 23.39,23.22 arc(23.34,22.96) 23.19,22.73 v1(22.96,22.5)
  BOTTOM w0.156: v1(22.96,22.5) 22.96,18.26 arc(23.02,17.96) 23.19,17.7 27.74,13.16 arc(27.91,12.9) 27.97,12.6 CH2.3
MIPI_DSI0_CLK_N: length 19.2
  TOP w0.102: U8.F9 28.51,32.85 arc(28.66,32.75) 28.83,32.72 29.59,32.72
  TOP w0.124: 29.59,32.72 32.6,32.72 arc(32.81,32.63) 32.89,32.42 32.89,32.36 arc(33.43,31.82) 33.97,32.36 33.97,32.5 arc(34.04,32.65) 34.19,32.72 34.62,32.72 arc(34.77,32.65) 34.84,32.5 34.84,32.4 arc(35.05,32.18) 35.27,32.4 35.27,32.5 arc(35.33,32.65) 35.48,32.72 35.55,32.72 36.42,31.85 36.42,31.22 arc(36.47,30.98) 36.61,30.78 37.18,30.21 arc(37.26,30.09) 37.29,29.95 37.29,29.92 arc(37.32,29.78) 37.4,29.66 v1(37.69,29.36)
  BOTTOM w0.124: v1(37.69,29.36) 38.1,29.36 arc(38.18,29.35) 38.25,29.3 38.38,29.17 arc(38.52,29.11) 38.66,29.17 38.8,29.3 41.01,29.3 42.35,30.64 CH1.5
MIPI_DSI0_CLK_P: length 19.2
  TOP w0.102: 29.59,33.04 29.58,33.04 29.52,32.98 29.48,32.98 29.47,32.97 29.1,32.97 arc(29.04,32.98) 28.99,33.01 28.93,33.07 U8.F10
  TOP w0.124: v1(38.48,30) 38.51,30.02 37.99,30.54 arc(37.88,30.58) 37.76,30.54 37.68,30.45 arc(37.44,30.45) 37.44,30.68 37.65,30.88 arc(37.65,31.11) 37.41,31.11 37.21,30.91 arc(36.98,30.91) 36.98,31.14 37.07,31.23 arc(37.12,31.35) 37.07,31.46 36.82,31.71 arc(36.77,31.78) 36.75,31.86 36.75,31.98 35.69,33.04 34.19,33.04 arc(33.81,32.88) 33.65,32.5 33.65,32.36 arc(33.43,32.15) 33.22,32.36 33.22,32.42 arc(33.04,32.86) 32.6,33.04 29.59,33.04
  BOTTOM w0.124: CH1.6 42.3,31.04 42.23,30.97 42.21,30.97 40.89,29.65 40.58,29.65 arc(40.5,29.68) 40.47,29.75 arc(40.44,29.83) 40.37,29.86 40.15,29.86 arc(40.08,29.83) 40.04,29.75 arc(40.01,29.68) 39.94,29.65 39.72,29.65 arc(39.65,29.68) 39.62,29.75 arc(39.58,29.83) 39.51,29.86 39.29,29.86 arc(39.22,29.83) 39.19,29.75 arc(39.16,29.68) 39.08,29.65 39,29.65 arc(38.84,29.68) 38.71,29.77 v1(38.48,30)
MIPI_DSI0_DATA0_N: length 19.2
  TOP w0.102: 29.59,31.45 29.44,31.45 29.39,31.5 28.83,31.5 28.82,31.51 28.67,31.51 arc(28.56,31.53) 28.47,31.59 U8.H9
  TOP w0.124: 29.59,31.45 29.64,31.39 29.72,31.39 29.8,31.31 arc(29.88,31.26) 29.97,31.24 30.08,31.24 arc(30.21,31.21) 30.33,31.14 30.35,31.12 arc(30.47,31.04) 30.6,31.01 31.24,31.01 arc(31.48,30.97) 31.68,30.83 32.03,30.48 32.03,30.18 33.08,29.13 arc(33.1,29.08) 33.08,29.03 arc(33.06,28.98) 33.08,28.93 33.33,28.68 arc(33.38,28.65) 33.43,28.68 arc(33.48,28.7) 33.53,28.68 33.76,28.45 35.08,28.45 35.1,28.47 35.22,28.47 arc(35.3,28.46) 35.37,28.41 v1(35.68,28.1)
  BOTTOM w0.124: v1(35.68,28.1) 35.96,28.39 arc(36.04,28.44) 36.12,28.45 36.69,28.45 arc(36.77,28.42) 36.8,28.33 36.8,28.13 arc(37.38,27.56) 37.95,28.13 37.95,28.2 arc(38.03,28.38) 38.2,28.45 38.22,28.45 arc(38.38,28.38) 38.45,28.22 38.45,28.13 arc(39.03,27.56) 39.6,28.13 39.6,28.2 arc(39.67,28.38) 39.85,28.45 40.91,28.45 arc(41.09,28.49) 41.25,28.59 42.4,29.75 42.43,29.75 42.55,29.87 42.73,29.87 CH1.3
MIPI_DSI0_DATA0_P: length 19.2
  TOP w0.102: U8.H10 29.36,31.78 29.39,31.75 29.56,31.75 29.58,31.77 29.59,31.77
  TOP w0.124: 29.59,31.77 30.32,31.77 arc(30.39,31.74) 30.42,31.66 arc(30.47,31.55) 30.59,31.5 arc(30.7,31.55) 30.75,31.66 arc(30.78,31.74) 30.86,31.77 30.99,31.77 arc(31.18,31.73) 31.35,31.62 32.36,30.62 32.36,30.31 33.32,29.35 arc(33.4,29.31) 33.47,29.35 arc(33.55,29.38) 33.62,29.35 33.7,29.27 arc(33.74,29.19) 33.7,29.12 arc(33.67,29.04) 33.7,28.96 33.89,28.78 34.94,28.78 34.97,28.8 35.3,28.8 35.32,28.81 35.36,28.81 v1(35.7,29.16)
  BOTTOM w0.124: v1(35.7,29.16) 36.01,28.86 arc(36.07,28.82) 36.14,28.8 36.24,28.8 36.26,28.78 36.69,28.78 arc(37,28.65) 37.13,28.33 37.13,28.13 arc(37.38,27.89) 37.63,28.13 37.63,28.2 arc(37.8,28.61) 38.2,28.78 38.22,28.78 arc(38.61,28.62) 38.78,28.22 38.78,28.13 arc(39.03,27.89) 39.27,28.13 39.27,28.2 arc(39.44,28.61) 39.85,28.78 40.1,28.78 arc(40.19,28.82) 40.22,28.9 arc(40.26,28.99) 40.35,29.03 40.43,29.03 arc(40.51,28.99) 40.55,28.9 arc(40.59,28.82) 40.67,28.78 40.91,28.78 arc(40.97,28.79) 41.02,28.83 42.27,30.07 42.29,30.07 42.36,30.15 arc(42.42,30.19) 42.5,30.2 42.72,30.2 CH1.4
MIPI_DSI0_DATA1_N: length 19.2
  TOP w0.102: 29.59,32.08 29.47,32.08 29.47,32.08 28.86,32.08 arc(28.65,32.12) 28.46,32.25 U8.G9
  TOP w0.124: 29.59,32.08 29.61,32.08 29.64,32.05 31.2,32.05 arc(31.31,32.03) 31.4,31.97 31.97,31.4 arc(32.18,31.26) 32.41,31.22 32.8,31.22 arc(32.95,31.15) 33.01,31 33.01,30.31 arc(33.55,29.77) 34.1,30.31 34.1,31 arc(34.16,31.15) 34.31,31.22 34.48,31.22 arc(34.59,31.19) 34.68,31.13 35.46,30.35 arc(35.52,30.31) 35.59,30.3 35.61,30.3 arc(35.68,30.29) 35.74,30.25 v1(35.81,30.18)
  BOTTOM w0.124: v1(35.81,30.18) 35.81,30.26 36.29,30.74 arc(36.49,30.87) 36.73,30.92 36.94,30.92 arc(37.03,30.9) 37.1,30.85 37.21,30.75 arc(37.39,30.62) 37.61,30.58 38.48,30.58 arc(38.72,30.63) 38.92,30.76 39.08,30.93 arc(39.23,31.02) 39.4,31.06 arc(39.57,31.02) 39.71,30.93 39.98,30.66 39.98,30.48 40.31,30.15 40.95,30.15 41.71,30.91 arc(41.76,30.94) 41.81,30.99 42.34,31.52 42.69,31.52 CH1.7
MIPI_DSI0_DATA1_P: length 19.2
  TOP w0.102: 29.59,32.44 29.46,32.44 29.36,32.33 29.08,32.33 arc(29.03,32.34) 28.99,32.37 U8.G10
  TOP w0.124: 29.59,32.44 29.72,32.44 29.77,32.38 31.2,32.38 arc(31.43,32.33) 31.64,32.2 32.21,31.63 arc(32.3,31.57) 32.41,31.54 32.8,31.54 arc(33.18,31.39) 33.34,31 33.34,30.31 arc(33.55,30.1) 33.77,30.31 33.77,31 arc(33.93,31.39) 34.31,31.54 34.48,31.54 arc(34.71,31.5) 34.91,31.36 35.33,30.94 arc(35.42,30.91) 35.51,30.94 v1(35.81,31.25)
  BOTTOM w0.124: CH1.8 42.21,31.84 41.58,31.22 arc(41.45,31.17) 41.33,31.22 41.02,31.52 arc(40.79,31.52) 40.79,31.29 41.07,31.01 arc(41.13,30.87) 41.07,30.73 40.92,30.58 40.5,30.58 40.31,30.77 40.31,30.79 39.94,31.16 arc(39.69,31.33) 39.4,31.39 arc(39.1,31.33) 38.85,31.16 38.69,30.99 arc(38.59,30.93) 38.48,30.91 37.61,30.91 arc(37.52,30.93) 37.44,30.98 37.34,31.08 arc(37.15,31.21) 36.94,31.25 v1(35.81,31.25)
MIPI_DSI0_DATA2_N: length 19.2
  TOP w0.102: U8.E9 28.5,33.52 28.5,33.43 28.57,33.35 29.18,33.35 29.2,33.33 29.59,33.33
  TOP w0.124: 29.59,33.33 35.69,33.33 35.69,33.32 arc(35.82,33.3) 35.93,33.23 36.47,32.69 37.26,32.69 37.28,32.67 37.56,32.67 38.09,32.14 arc(38.21,31.96) 38.25,31.75 v1(38.25,31.5)
  BOTTOM w0.124: v1(38.25,31.5) 38.55,31.5 arc(38.77,31.54) 38.95,31.67 39.14,31.85 39.37,31.85 arc(39.71,32) 39.86,32.34 39.86,32.87 arc(39.94,33.07) 40.15,33.16 40.8,33.16 arc(40.9,33.12) 40.94,33.01 40.94,32.95 arc(40.91,32.87) 40.83,32.83 40.67,32.83 arc(40.18,32.34) 40.67,31.85 41.53,31.85 arc(41.76,31.9) 41.96,32.03 42.09,32.16 arc(42.18,32.22) 42.29,32.24 CH1.9
MIPI_DSI0_DATA2_P: length 19.2
  TOP w0.102: U8.E10 29.23,33.73 29.3,33.66 29.59,33.66
  TOP w0.124: 29.59,33.66 35.97,33.66 36.6,33.02 37.01,33.02 37.07,33.13 37.07,33.54 arc(37.23,33.71) 37.4,33.54 37.4,33.13 37.47,32.99 37.7,32.99 38.23,32.46 38.51,32.38 v1(38.73,32.38)
  BOTTOM w0.124: CH1.10 42.69,32.57 42.29,32.57 arc(42.06,32.52) 41.86,32.39 41.73,32.26 arc(41.64,32.2) 41.53,32.18 40.67,32.18 arc(40.51,32.34) 40.67,32.51 41.15,32.51 arc(41.24,32.54) 41.27,32.63 41.27,33.01 arc(41.13,33.35) 40.8,33.49 40.15,33.49 arc(39.71,33.31) 39.53,32.87 39.53,32.34 arc(39.48,32.23) 39.37,32.18 39.01,32.18 38.97,32.15 v1(38.73,32.38)
MIPI_DSI0_DATA3_N: length 19.3
  TOP w0.124: v1(43.71,28.54) 43.71,28.63 arc(43.7,28.67) 43.68,28.71 38.4,33.99 29.26,33.99 29.16,34.09 28.57,34.09 U8.D9
  BOTTOM w0.124: v1(43.71,28.54) 43.71,28.78 arc(43.64,28.96) 43.45,29.04 CH1.1
MIPI_DSI0_DATA3_P: length 19.2
  TOP w0.124: U8.D10 29.24,34.38 29.26,34.36 29.61,34.36 29.66,34.31 38.54,34.31 39.6,33.25 arc(39.71,33.2) 39.82,33.25 arc(39.92,33.29) 40.03,33.25 40.17,33.11 arc(40.21,33) 40.17,32.9 arc(40.12,32.79) 40.17,32.68 40.31,32.55 arc(40.41,32.5) 40.52,32.55 arc(40.63,32.59) 40.73,32.55 40.87,32.41 arc(40.91,32.3) 40.87,32.2 arc(40.83,32.09) 40.87,31.98 41.01,31.85 arc(41.11,31.8) 41.22,31.85 arc(41.34,31.9) 41.46,31.85 41.57,31.73 arc(41.62,31.61) 41.57,31.5 arc(41.53,31.39) 41.57,31.28 41.71,31.14 arc(41.81,31.1) 41.92,31.14 arc(42.01,31.18) 42.1,31.14 42.27,30.97 arc(42.31,30.88) 42.27,30.79 arc(42.23,30.69) 42.27,30.58 42.75,30.1 42.75,30.05 43.04,29.76 43.11,29.76 arc(43.28,29.65) 43.48,29.61 v1(43.71,29.61)
  BOTTOM w0.124: v1(43.71,29.61) 43.65,29.61 43.53,29.48 arc(43.4,29.4) 43.26,29.37 42.84,29.37 CH1.2
MIPI_DSI1_CLK_N: length 31.9
  TOP w0.102: U8.B7 26.66,36 26.66,36.98
  TOP w0.124: 26.66,36.98 26.66,37.98 arc(26.7,38.22) 26.84,38.42 29.94,41.52 arc(30.14,41.66) 30.38,41.7 34.22,41.7 34.66,41.26 arc(34.87,41.17) 35.07,41.26 35.21,41.39 arc(35.41,41.48) 35.61,41.39 35.7,41.3 arc(35.86,40.92) 35.7,40.53 35.65,40.48 arc(35.65,40.27) 35.86,40.27 37,41.4 arc(37.29,41.52) 37.58,41.4 37.61,41.38 arc(37.76,41.02) 37.61,40.66 36.54,39.59 arc(36.54,39.38) 36.75,39.38 37.12,39.75 37.24,39.83 37.75,40.34 arc(37.91,40.45) 38.08,40.48 38.12,40.48 arc(38.29,40.45) 38.45,40.34 38.47,40.32 arc(38.57,40.17) 38.61,39.99 38.61,39.72 arc(38.56,39.49) 38.43,39.28 37.5,38.35 arc(37.43,38.26) 37.41,38.15 37.41,37.42 arc(37.46,37.18) 37.59,36.98 v1(37.82,36.75)
  BOTTOM w0.124: CH1.16 42.33,35.04 arc(42.22,35.06) 42.13,35.13 41.68,35.58 40.01,35.58 arc(39.9,35.6) 39.81,35.66 39.42,36.05 arc(39.26,36.15) 39.07,36.19 38.6,36.19 arc(38.4,36.23) 38.23,36.35 v1(37.82,36.75)
MIPI_DSI1_CLK_P: length 32
  TOP w0.102: 26.98,36.98 U8.A7
  TOP w0.124: v1(36.75,36.7) 36.93,36.88 arc(37.04,37.05) 37.08,37.25 37.08,38.15 arc(37.13,38.39) 37.27,38.59 38.2,39.52 arc(38.26,39.61) 38.28,39.72 38.28,39.99 arc(38.27,40.04) 38.24,40.09 38.21,40.11 arc(38.17,40.14) 38.12,40.15 38.08,40.15 arc(38.03,40.14) 37.99,40.11 37.45,39.58 37.33,39.5 36.99,39.15 arc(36.31,39.15) 36.31,39.82 37.38,40.89 arc(37.43,41.02) 37.38,41.14 37.35,41.17 arc(37.29,41.2) 37.23,41.17 36.1,40.04 arc(35.42,40.04) 35.42,40.71 35.47,40.76 arc(35.53,40.92) 35.47,41.07 arc(35.41,41.09) 35.35,41.07 35.3,41.03 arc(34.87,40.85) 34.43,41.03 34.08,41.38 30.38,41.38 arc(30.27,41.35) 30.17,41.29 27.07,38.19 arc(27.01,38.09) 26.98,37.98 26.98,36.98
  BOTTOM w0.124: CH1.15 42.69,34.71 42.33,34.71 arc(42.1,34.76) 41.89,34.9 41.54,35.25 40.01,35.25 arc(39.78,35.3) 39.58,35.43 39.19,35.81 arc(39.14,35.85) 39.07,35.86 38.85,35.86 arc(38.73,35.82) 38.68,35.7 38.68,35.52 arc(38.52,35.35) 38.36,35.52 38.36,35.65 arc(38.29,35.8) 38.14,35.86 38.12,35.86 arc(37.92,35.9) 37.75,36.02 37.17,36.6 arc(37.05,36.68) 36.92,36.7 v1(36.75,36.7)
MIPI_DSI1_DATA0_N: length 31.9
  TOP w0.102: 27.94,36.98 27.94,36.18 arc(27.97,36.03) 28.05,35.91 U8.B9
  TOP w0.124: v1(33.99,38.51) 33.79,38.32 arc(33.59,38.19) 33.36,38.14 31.44,38.14 arc(31.36,38.17) 31.33,38.26 arc(30.84,38.75) 30.34,38.26 30.34,38.14 30.13,38.14 arc(30.05,38.17) 30.02,38.26 arc(29.53,38.75) 29.04,38.26 29.04,38.14 28.47,38.14 arc(28.28,38.1) 28.12,37.99 27.95,37.82 27.95,37.51 27.94,37.5 27.94,36.98
  BOTTOM w0.124: v1(33.99,38.51) 34.16,38.33 arc(34.22,38.29) 34.29,38.28 34.39,38.28 34.64,38.53 arc(34.84,38.66) 35.08,38.71 35.74,38.71 arc(35.83,38.74) 35.86,38.83 35.86,41.47 arc(36.35,41.96) 36.85,41.47 36.85,38.87 arc(37.06,38.66) 37.27,38.87 37.27,40.81 arc(37.77,41.3) 38.26,40.81 38.26,38.83 arc(38.29,38.74) 38.38,38.71 38.56,38.71 39.87,37.4 arc(40,37.08) 39.87,36.76 39.86,36.76 arc(39.83,36.72) 39.82,36.67 39.82,36.58 39.91,36.5 40.07,36.5 40.48,36.91 arc(40.83,37.05) 41.18,36.91 41.89,36.19 41.92,36.19 42.27,35.84 CH1.18
MIPI_DSI1_DATA0_P: length 31.9
  TOP w0.102: 28.28,36.98 28.28,36.35 28.27,36.33 28.27,36.33 U8.A9
  TOP w0.124: 28.28,36.98 28.28,37.5 28.28,37.51 28.28,37.69 28.35,37.76 arc(28.41,37.8) 28.47,37.81 29.06,37.81 arc(29.27,37.9) 29.36,38.12 29.36,38.26 arc(29.53,38.42) 29.69,38.26 arc(29.82,37.94) 30.13,37.81 30.37,37.81 arc(30.58,37.9) 30.67,38.12 30.67,38.26 arc(30.84,38.42) 31,38.26 arc(31.13,37.94) 31.44,37.81 32.35,37.81 arc(32.47,37.76) 32.51,37.65 32.51,37.3 arc(32.68,37.13) 32.84,37.3 32.84,37.44 arc(32.95,37.7) 33.21,37.81 33.36,37.81 arc(33.59,37.77) 33.79,37.63 v1(33.99,37.44)
  BOTTOM w0.124: v1(33.99,37.44) 34.5,37.95 34.53,37.95 34.87,38.29 arc(34.97,38.36) 35.08,38.38 35.74,38.38 arc(36.06,38.51) 36.19,38.83 36.19,41.47 arc(36.35,41.63) 36.52,41.47 36.52,38.87 arc(37.06,38.33) 37.6,38.87 37.6,40.81 arc(37.77,40.97) 37.93,40.81 37.93,38.83 arc(38.06,38.51) 38.38,38.38 38.42,38.38 39.64,37.17 arc(39.67,37.08) 39.64,36.99 39.63,36.99 arc(39.53,36.84) 39.5,36.67 39.5,36.45 39.83,36.12 40.15,36.12 40.71,36.68 arc(40.83,36.73) 40.94,36.68 41.76,35.86 41.78,35.86 42.14,35.51 42.23,35.51 42.3,35.44 CH1.17
MIPI_DSI1_DATA1_N: length 32
  TOP w0.102: 27.28,36.98 27.28,36.12 arc(27.3,36.04) 27.34,35.97 U8.B8
  TOP w0.124: v1(36.22,35.59) 35.69,36.12 arc(35.59,36.26) 35.56,36.43 35.56,36.55 arc(35.58,36.61) 35.65,36.64 arc(35.75,36.68) 35.79,36.78 35.79,36.88 arc(35.76,36.94) 35.7,36.97 35.65,36.97 arc(35.58,36.99) 35.56,37.06 35.56,39.24 arc(35.51,39.48) 35.38,39.68 34.14,40.92 arc(33.94,41.05) 33.7,41.1 33.51,41.1 arc(33.19,40.97) 33.06,40.65 33.06,39.17 arc(32.9,39.01) 32.73,39.17 32.73,40.65 arc(32.6,40.97) 32.29,41.1 32.14,41.1 arc(31.87,40.98) 31.75,40.71 31.75,39.3 arc(31.59,39.14) 31.42,39.3 31.42,40.41 31.1,40.74 30.52,40.74 30.08,40.29 30.08,39.45 29.97,39.35 28.62,39.35 27.49,38.22 arc(27.33,37.99) 27.28,37.71 27.28,36.98
  BOTTOM w0.124: v1(36.22,35.59) 35.81,35.18 35.81,35.13 35.91,35.03 arc(36,34.97) 36.1,34.95 41.17,34.95 arc(41.41,34.9) 41.61,34.77 41.96,34.42 41.99,34.42 42.16,34.24 CH1.14
MIPI_DSI1_DATA1_P: length 31.9
  TOP w0.102: U8.A8 27.63,36.98
  TOP w0.124: v1(35.23,35.74) 35.23,37.26 arc(35.18,37.38) 35.06,37.43 34.76,37.43 arc(34.59,37.59) 34.76,37.75 35.07,37.75 arc(35.23,37.92) 35.07,38.08 34.81,38.08 arc(34.65,38.25) 34.81,38.41 35.07,38.41 arc(35.18,38.46) 35.23,38.57 35.23,39.24 arc(35.21,39.36) 35.14,39.45 33.91,40.68 arc(33.82,40.75) 33.7,40.77 33.51,40.77 arc(33.42,40.73) 33.39,40.65 33.39,39.17 arc(32.9,38.68) 32.41,39.17 32.41,40.65 arc(32.37,40.74) 32.29,40.77 32.23,40.77 arc(32.12,40.73) 32.08,40.62 32.08,39.3 arc(31.61,38.81) 31.09,39.25 31.09,40.26 30.94,40.41 30.66,40.41 30.4,40.16 30.4,39.32 30.11,39.02 28.76,39.02 27.72,37.99 arc(27.66,37.89) 27.63,37.78 27.63,36.98
  BOTTOM w0.124: CH1.13 42.28,33.84 42.21,33.92 42.03,33.92 41.85,34.09 41.83,34.09 41.38,34.54 arc(41.28,34.6) 41.17,34.62 36.1,34.62 arc(35.88,34.67) 35.68,34.8 35.49,34.99 35.48,34.99 35.35,35.13 arc(35.26,35.26) 35.23,35.41 v1(35.23,35.74)
MIPI_DSI1_DATA2_N: length 32
  TOP w0.102: 25.96,36.98 25.96,36.18 arc(25.99,36.06) 26.06,35.95 U8.B6
  TOP w0.124: 25.96,36.98 25.96,38.95 25.99,38.98 25.99,39.71 26.01,39.73 26.01,39.88 26.72,40.59 26.98,40.59 27.23,40.71 v1(27.61,41.09)
  BOTTOM w0.124: CH1.12 42.04,33.44 41.47,34.01 arc(41.27,34.14) 41.03,34.19 40.19,34.19 arc(40.13,34.21) 40.11,34.27 arc(40.09,34.32) 40.03,34.35 39.76,34.35 arc(39.71,34.32) 39.68,34.27 arc(39.66,34.21) 39.6,34.19 39.33,34.19 arc(39.28,34.21) 39.25,34.27 arc(39.23,34.32) 39.18,34.35 38.9,34.35 arc(38.85,34.32) 38.82,34.27 arc(38.8,34.21) 38.75,34.19 38.47,34.19 arc(38.42,34.21) 38.4,34.27 arc(38.37,34.32) 38.32,34.35 38.05,34.35 arc(37.99,34.32) 37.97,34.27 arc(37.94,34.21) 37.89,34.19 37.62,34.19 arc(37.56,34.21) 37.54,34.27 arc(37.52,34.32) 37.46,34.35 37.19,34.35 arc(37.13,34.32) 37.11,34.27 arc(37.09,34.21) 37.03,34.19 36.76,34.19 arc(36.7,34.21) 36.68,34.27 arc(36.66,34.32) 36.6,34.35 36.33,34.35 arc(36.27,34.32) 36.25,34.27 arc(36.23,34.21) 36.17,34.19 35.81,34.19 arc(35.72,34.21) 35.65,34.26 33.42,36.49 33.42,37.12 arc(33.37,37.36) 33.23,37.56 32.95,37.85 arc(32.89,38) 32.95,38.15 33,38.2 arc(33.06,38.35) 33,38.5 33,38.5 arc(32.85,38.56) 32.7,38.5 32.65,38.45 arc(32.5,38.39) 32.34,38.45 32.3,38.5 arc(32.09,38.63) 31.86,38.68 31.04,38.68 arc(30.92,38.7) 30.83,38.77 30.79,38.81 arc(30.74,38.91) 30.79,39.02 31.58,39.81 arc(31.72,40.16) 31.58,40.51 arc(31.23,40.65) 30.89,40.51 30.1,39.72 arc(29.81,39.72) 29.81,40.02 30.37,40.58 arc(30.52,40.93) 30.37,41.28 arc(30.03,41.42) 29.68,41.28 29.11,40.71 28.23,40.71 arc(28,40.76) 27.8,40.89 v1(27.61,41.09)
MIPI_DSI1_DATA2_P: length 32
  TOP w0.102: U8.A6 26.33,36.98
  TOP w0.124: v1(27.64,40.03) 27.5,40.03 arc(27.39,40.05) 27.31,40.11 27.25,40.17 arc(27.15,40.24) 27.03,40.26 26.85,40.26 26.33,39.74 26.33,39.59 26.31,39.57 26.31,39.12 26.33,39.1 26.33,36.98
  BOTTOM w0.124: v1(27.64,40.03) 27.62,40.03 27.9,40.31 arc(27.99,40.37) 28.09,40.39 28.79,40.39 arc(29.08,40.34) 29.35,40.48 29.91,41.05 arc(30.03,41.1) 30.14,41.05 arc(30.19,40.93) 30.14,40.82 29.58,40.25 arc(29.58,39.49) 30.33,39.49 31.12,40.27 arc(31.23,40.32) 31.35,40.27 arc(31.4,40.16) 31.35,40.04 30.56,39.25 arc(30.42,38.91) 30.56,38.58 30.6,38.54 arc(30.8,38.4) 31.04,38.35 31.86,38.35 arc(31.97,38.33) 32.06,38.27 33,37.33 arc(33.07,37.24) 33.09,37.12 33.09,36.36 33.33,36.11 arc(33.39,35.96) 33.33,35.81 33.14,35.62 arc(33.14,35.31) 33.44,35.31 33.63,35.51 arc(33.94,35.51) 33.94,35.2 33.75,35.01 arc(33.75,34.71) 34.05,34.71 34.24,34.9 arc(34.54,34.9) 34.54,34.6 34.44,34.49 arc(34.44,34.19) 34.74,34.19 34.85,34.29 arc(35,34.36) 35.15,34.29 35.42,34.03 arc(35.6,33.91) 35.81,33.86 41.03,33.86 arc(41.14,33.84) 41.24,33.78 41.9,33.11 42.21,33.11 42.28,33.04 CH1.11
MIPI_DSI1_DATA3_N: length 32
  TOP w0.102: U8.B5 25.47,35.89 arc(25.39,36.02) 25.36,36.17 25.36,36.98
  TOP w0.124: v1(39.19,39.36) 39.39,39.55 arc(39.58,39.68) 39.82,39.73 40.23,39.73 arc(40.47,39.78) 40.67,39.91 40.73,39.96 arc(40.85,40.27) 40.73,40.57 39.03,42.26 arc(38.83,42.4) 38.6,42.44 27.92,42.44 arc(27.68,42.4) 27.48,42.26 25.36,40.15 25.36,39.97 25.36,39.96 25.36,36.98
  BOTTOM w0.124: CH1.20 43.31,36.64 43.35,36.61 43.6,36.61 43.73,36.73 43.73,37.8 arc(43.69,37.89) 43.6,37.93 41.75,37.93 arc(41.56,37.96) 41.4,38.07 41.01,38.46 arc(40.9,38.51) 40.79,38.46 arc(40.69,38.42) 40.58,38.46 40.49,38.55 arc(40.45,38.66) 40.49,38.77 arc(40.54,38.87) 40.49,38.98 39.79,39.68 arc(39.74,39.72) 39.67,39.73 39.64,39.73 arc(39.57,39.71) 39.51,39.67 v1(39.19,39.36)
MIPI_DSI1_DATA3_P: length 31.9
  TOP w0.102: 25.68,36.98 25.68,36.35 25.67,36.33 25.67,36.33 U8.A5
  TOP w0.124: 25.68,36.98 25.68,39.83 25.69,39.83 25.69,40.01 27.71,42.03 arc(27.81,42.09) 27.92,42.12 38.6,42.12 arc(38.71,42.09) 38.8,42.03 40.49,40.34 arc(40.52,40.27) 40.49,40.19 40.44,40.14 arc(40.35,40.08) 40.23,40.06 39.82,40.06 arc(39.58,40.1) 39.39,40.23 v1(39.19,40.43)
  BOTTOM w0.124: v1(39.19,40.43) 39.5,40.12 arc(39.57,40.07) 39.66,40.06 39.67,40.06 arc(39.86,40.02) 40.03,39.91 40.55,39.38 arc(40.67,39.33) 40.79,39.38 40.96,39.55 arc(41.19,39.55) 41.19,39.32 41.02,39.15 arc(41.02,38.92) 41.25,38.92 41.37,39.03 arc(41.6,39.03) 41.6,38.8 41.51,38.72 arc(41.45,38.57) 41.51,38.42 41.63,38.3 arc(41.69,38.26) 41.75,38.25 43.6,38.25 arc(43.92,38.12) 44.05,37.8 44.05,36.59 43.74,36.28 43.35,36.28 43.31,36.24 CH1.19
